# Altium PCB PCB_TPS5430.PcbDoc
Units mil, origin at the board's own origin, x right, y up, seen from the top; angles counter-clockwise.
Board outline 1417.32 x 708.66 mil, 2 copper layers (Top Layer, Bottom Layer); 34 components, 13 nets, 83 pads, 165 vias.
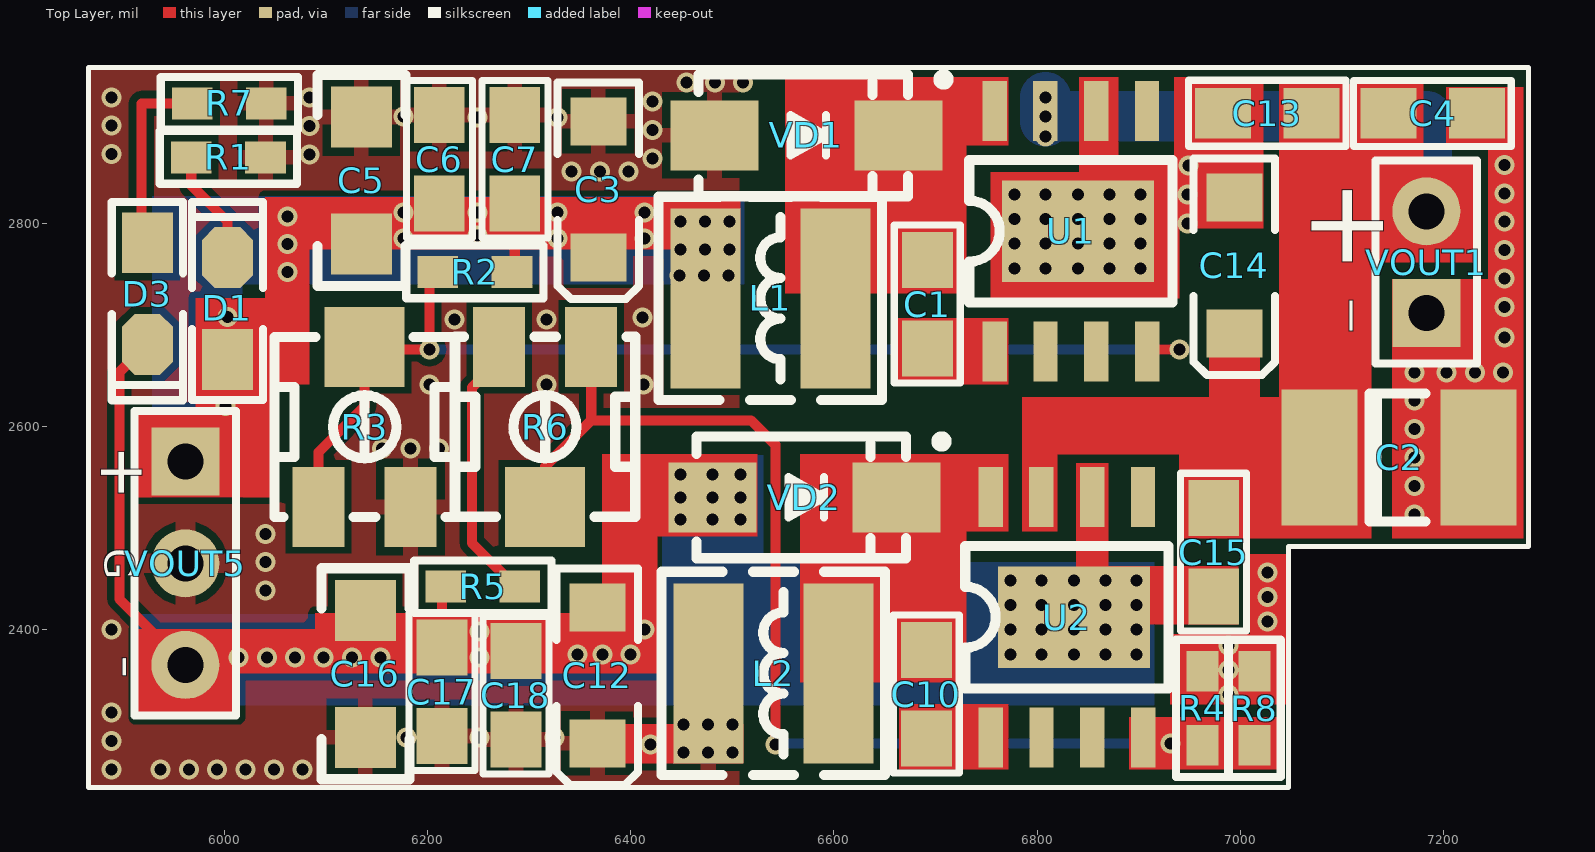
[diagram p0: Top Layer view]
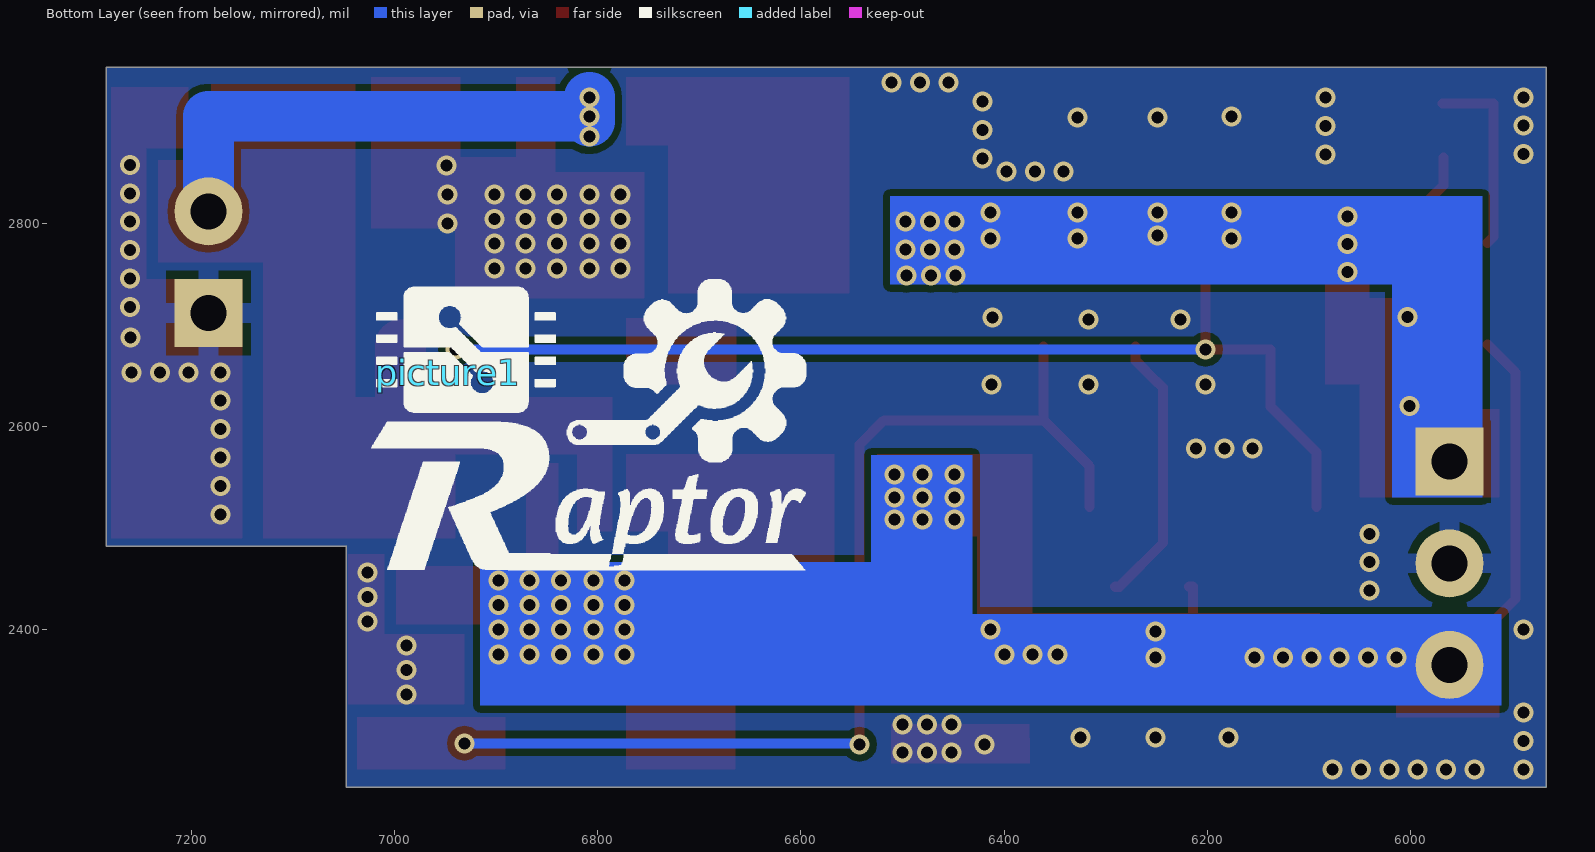
[diagram p1: Bottom Layer view, seen from below]

## Layer stack, top to bottom
Top Solder: solder mask 0.4, Solder Resist, Dk 3.5
Top Layer: signal copper 1.4
Dielectric 1: dielectric 12.6, FR-4, Dk 4.8
Bottom Layer: signal copper 1.4
Bottom Solder: solder mask 0.4, Solder Resist, Dk 3.5

## Board outline
5866.14,2245.08 7047.24,2245.08 7047.24,2246.06 7047.24,2482.28 7283.46,2482.28 7283.46,2953.74 5866.14,2953.74

## Design rules (kind name [scope] priority, off if disabled: settings)
Clearance [All] p1: gap=7 ignorepadtopadclearanceinfootprint=FALSE
PolygonConnect [All] p1: thpad.connectstyle=Relief thpad.reliefconductorwidth=20 thpad.reliefentries=4 thpad.polygonreliefangle="90 Angle" thpad.airgapwidth=8 smdpad.connectstyle=Relief smdpad.reliefconductorwidth=15 smdpad.reliefentries=4 smdpad.polygonreliefangle="90 Angle" smdpad.airgapwidth=8 via.connectstyle=Direct via.reliefconductorwidth=10 via.reliefentries=4 via.polygonreliefangle="90 Angle" via.airgapwidth=10
RoomDefinition Sheet_TPS5430 [InComponentClass('Sheet_TPS5430')] p1: confinementstyle=ConfineIn formatcopy=TRUE lockcomponents=FALSE outline 0,0 2000,0 2000,1000 0,1000
RoutingVias [All] p1: holewidth=28 width=50 viastyle="Through Hole" minholewidth=28 minwidth=50 maxholewidth=28 maxwidth=50
SolderMaskExpansion [All] p1: expansion=4 istentingtop=FALSE
Width [All] p1: maxlimit=50 minlimit=10 preferedwidth=10
30 further rules are at their usual default settings.

## Components (designator, comment, footprint, x,y, rotation, side; value= is the part's Value field where it differs from the comment)
C1 "103" 0805c 6691.65,2677.21 r90 top
C2 "1uf" 1812 7154.53,2569.88 r0 top
C3 "钽电容(大)" "CD A(3216)" 6368.11,2833.66 r90 top
C4 "104" 0805c 7232.63,2908.19 r180 top
C5 "100uF" 1206C 6129.93,2842.92 r270 top
C6 "104" 0805c 6211.87,2906.81 r270 top
C7 "10uF" 0805c 6286.12,2906.76 r270 top
C10 "103" 0805c 6690.67,2293.35 r90 top
C12 "钽电容(大)" "CD A(3216)" 6367.13,2355.32 r90 top
C13 "104" 0805c 6982.92,2908.74 r0 top
C14 "钽电容(大)" "CD A(3216)" 6994.09,2758.86 r90 top
C15 "104" 0805c 6973.43,2433.07 r90 top
C16 "100uF" 1206C 6143.69,2356.31 r90 top
C17 "104" 0805c 6213.88,2295.56 r90 top
C18 "10uF" 0805c 6286.68,2292.29 r90 top
D1 "0805led" "LED 0805B" 6003.07,2716.38 r90 top
D3 "0805led" "LED 0805B" 5924.21,2731.1 r270 top
L1 "15/22uH" CD42 6537.4,2726.38 r180 top
L2 "15/22uH" CD42 6540.35,2357.28 r180 top
picture1 "图标" rapter 6946.85,2653.54 r180 bottom
R1 "1k" "R 0603" 6003.94,2865.16 r0 top
R2 "10k" "R 0603" 6246.56,2752.44 r0 top
R3 "3.24k" RPart 6135.83,2600.39 r90 top
R4 "0R" "R 0603" 6962.6,2322.83 r90 top
R5 "10k" "R 0603" 6254.4,2442.52 r0 top
R6 "5k" RPart 6317.91,2599.41 r270 top
R7 "1k" "R 0603" 6004.84,2918.31 r180 top
R8 "0R" "R 0603" 7013.78,2322.83 r90 top
U1 "TPS5430" "SOIC-8(ADD 9PIN)" 6841.54,2792.32 r90 top locked
U2 "TPS5430" "SOIC-8(ADD 9PIN)" 6837.6,2412.4 r90 top locked
VD1 "US1G" SMA 6572.83,2886.81 r0 top
VD2 "US1G" SMA 6570.87,2530.51 r0 top
VOUT1 "Header 2" HDR-1X2 7183.07,2712.01 r90 top
VOUT5 "Header 3" HDR-1X3 5961.61,2565.55 r270 top

## Footprints (in the part's own frame and the unit in brackets; to place one, negate y for a bottom-side part, rotate by r counter-clockwise, add the part's x,y. Pads: shape width x height; smd on the part's side, far side on the other; paste and mask are expansions set on the pad)
0805c [mm]
  rect 1.4x1.27 smd: 1(-0.001,-0.007) 2(2.209,-0.007)
  silkscreen extent -0.86,-0.83 3.08,0.82, body extent -0.41,-0.67 2.59,0.73, height 0.93
1206C [mil]
  rect 60x60 smd: 1(-62.02,4.91) 2(62.98,4.91)
  silkscreen extent -103,-38 104,48, body extent -64,-27 62,36, height 24
1812 [mm] "Chip Capacitor; Body 4.5 x 3.2 mm (LxW typ)"
  rect 1.9x3.4 smd: 1(-1.95,0) 2(2.032,0)
  silkscreen extent -0.7,-1.6 0.7,1.6, body extent -2,-1.6 2.5,1.6, height 1.6
CD42 [mm] "4.5*4*2mm（长宽高）"
  rect 1.75x4.5 smd: 1(-1.625,0) 2(1.625,0)
  silkscreen extent -2.79,-2.54 2.79,2.54, body extent -2.21,-2 2.21,2, height 2.1
"CD A(3216)" [mm] "长3.2mm，宽1.6mm，厚1.6mm"
  rect 1.2x1.4 smd: 1(-1.7,0) 2(1.7,0)
  silkscreen extent -2.74,-1.02 2.67,1.02, body extent -1.6,-0.8 1.6,0.8, height 1.6
HDR-1X2 [mm] "排针，2脚"
  rect 1.7x1.7 hole 0.9: 1(0,0)
  round 1.7 hole 0.9: 2(2.54,0)
  silkscreen extent -1.27,-1.27 3.81,1.27, body extent -1.27,-1.27 3.81,1.27, height 8.5
HDR-1X3 [mm] "排针，3脚"
  rect 1.7x1.7 hole 0.9: 1(0,0)
  round 1.7 hole 0.9: 2(2.54,0) 3(5.08,0)
  silkscreen extent -1.27,-1.27 6.35,1.27, body extent -1.27,-1.27 6.35,1.27, height 8.5
"LED 0805B" [mil] "蓝色0805LED"
  rect 60x50 smd: 1(-50,0)
  oct 60x50 smd: 2(50,0)
  silkscreen extent -90,-35 105,35, body extent -39,-25 39,25, height 32
"R 0603" [mil] "1/10W贴片电阻"
  rect 40x31.5 smd: 1(-36.5,0) 2(36.5,0)
  silkscreen extent -68,-26 68,26, body extent -31,-16 32,16, height 16
rapter [mil]
  silkscreen extent -76,-195 352,91
RPart [mm]
  rect 2x1.3 smd: 1(-2.014,-1.203) 3(-2.014,1.097)
  rect 2x2 smd: 2(1.986,-0.053)
  silkscreen extent -2.26,-2.3 2.24,2.2
SMA [mm] "4.5x2.6*2.2mm（长宽高，不包括引脚）"
  rect 2.2x1.75 smd: 1(-2.3,0) 2(2.3,0)
  silkscreen extent -2.7,-1.52 3.56,1.52, body extent -2.53,-1.3 2.58,1.3, height 2.15
"SOIC-8(ADD 9PIN)" [mil]
  rect 59.06x24 smd: 1(-118.3,83.4) 2(-118.3,33.34) 3(-118.3,-16.66) 4(-118.3,-66.66) 5(118.2,-66.6) 6(118.2,-16.6) 7(118.2,33.4) 8(118.2,83.4)
  rect 100x150 smd: 9(-0.06,1.34)
  silkscreen extent -70,-92 70,108, body extent -119,-87 117,105, height 67

## Part data
C1 C10: library part 0805C
C2: library part Cap, "贴片电容", LatestRevisionDate=17-Jul-2002, LatestRevisionNote="Re-released for DXP Platform.", PackageDescription="Radial Cap, Thru-Hole; 2 Leads; 0.3 in Pin Spacing", PackageReference=RAD-0.3, Published=8-Jun-2000, Publisher="Altium Limited"
C4 C6 C7 C13 C15 C17 C18: library part 0805c
C5 C16: library part 1206c
L1 L2: library part 电感
picture1: library part SP
R1 R2 R4 R5 R7 R8: library part 0805r
R3 R6: library part RES_TAP
VD1 VD2: library part SS14, "肖特基二极管", BOM名称=肖特基二极管, 学习资源=www.ooocke.com, 属性=40V/1A, 版权归属=源创客
VOUT1: "Header, 2-Pin", LatestRevisionDate=17-Jul-2002, LatestRevisionNote="Re-released for DXP Platform.", Publisher="Altium Limited"
VOUT5: "Header, 3-Pin", LatestRevisionDate=17-Jul-2002, LatestRevisionNote="Re-released for DXP Platform.", Publisher="Altium Limited"

## Via types
v1: diameter 19.68, hole 11.81, Top Layer to Bottom Layer, tented both sides, 165 vias

## Nets (pads, with @x,y where several pads share a name; then routed paths per layer and width w, separated by ;. In a path a pad name is that pad's centre, name@x,y a point inside that pad or via, vN(x,y) a via of type N, cw(c..) or ccw(c..) an arc to the next point about the centre after c; other vN are vias at no path point)
GND: C2.2 C3.2 C4.1 C5.1 C6.1 C7.1 C12.1 C13.1 C14.2 C16.1 C17.1 C18.1 L2.2 R1.2 R3.1 R4.2 R7.1 R8.2 U1.6 U1.9 VD1.1 VOUT1.1 VOUT5.2
  other v1: 5888.78,2262.8 5937.01,2262.8 5964.96,2262.8 5992.91,2262.8 6020.87,2262.8 6048.82,2262.8 6076.77,2262.8 6451.77,2279.22 6475.89,2279.22 6500,2279.22 6419.29,2287.4 5888.78,2290.75 6179.13,2294.29 6250.98,2294.29 6324.8,2294.29 6451.77,2307.09 6475.89,2307.09 6500,2307.09 5888.78,2318.7 6988.19,2336.61 6988.19,2360.73 6988.19,2384.84 5888.78,2400.59 7026.57,2408.46 7026.57,2432.58 6040.44,2438.68 7026.57,2456.69 6040.44,2466.63 6040.44,2494.59 7171.26,2513.78 7171.26,2541.73 7171.26,2569.69 6155.28,2578.63 6183.23,2578.63 6211.18,2578.63 7171.26,2597.64 7171.26,2625.59 6201.77,2641.73 6316.93,2641.73 6412.4,2641.73 7171.26,2653.54 7202.76,2653.54 7230.71,2653.54 7258.66,2653.54 7259.84,2687.99 6226.38,2705.71 6316.93,2705.71 6411.42,2707.68 7260.21,2717.91 7260.21,2745.86 6777.56,2755.91 6808.14,2755.91 6840.2,2755.91 6871.06,2755.91 6901.57,2755.91 7260.21,2773.82 6777.56,2780.51 6808.14,2780.51 6840.2,2780.51 6871.06,2780.51 6901.57,2780.51 6947.83,2800.2 7260.21,2801.77 6777.56,2804.63 6808.14,2804.63 6840.2,2804.63 6871.06,2804.63 6901.57,2804.63 6777.56,2828.74 6808.14,2828.74 6840.2,2828.74 6871.06,2828.74 6901.57,2828.74 6947.83,2828.74 7260.21,2829.72 6341.73,2851.38 6369.69,2851.38 6397.64,2851.38 6948.82,2857.28 7260.21,2857.67 6421.26,2864.17 5888.78,2868.31 6083.66,2868.11 6421.26,2892.13 5888.78,2896.26 6083.66,2896.06 6249.02,2904.53 6327.76,2904.53 6176.18,2905.51 6421.26,2920.08 5888.78,2924.21 6083.66,2924.02 6454.72,2938.98 6482.68,2938.98 6510.63,2938.98
NetC1_1: C1.1 U1.1
NetC1_2: C1.2 L1.1 U1.8 VD1.2
NetC10_1: C10.1 U2.1
NetC10_2: C10.2 L2.1 U2.8 VD2.2
NetD1_2: D1.2 R1.1 | length 113.5
  Top Layer w10: R1.1 5967.44,2837.68 6003.07,2802.05 D1.2
NetD3_1: D3.1 R7.2 | length 189.7
  Top Layer w10: D3.1 5918.31,2787.01 5918.31,2918.31 R7.2
NetR2_1: R2.1 R3.2 R3.3 U1.4 | length 1094.3
  Top Layer w10: R3.3 6092.65,2574.93 6137.93,2620.21 6137.93,2676.18 v1(6201.77,2676.18) 6201.77,2752.44 R2.1 ; U1.4 6908.2,2676.18 v1(6939.96,2676.18)
  Bottom Layer w10: v1(6201.77,2676.18) v1(6939.96,2676.18)
NetR4_1: R4.1 R6.2 R6.3 R8.1 U2.4 | length 1051.5
  Top Layer w10: R6.2 6315.81,2561.02 6361.09,2606.3 ; R6.3 6361.09,2606.3 ; v1(6542.32,2287.4) 6542.32,2582.33 6518.35,2606.3 6361.09,2606.3
  Bottom Layer w10: v1(6542.32,2287.4) 6543.31,2288.39 v1(6931.1,2288.39)
NetR5_2: R5.2 R6.1 | length 269.7
  Top Layer w10: R6.1 6270.53,2664.91 6249.94,2644.32 6249.44,2644.32 6243.59,2638.46 6243.59,2485.58 6286.64,2442.52 R5.2
VC5N: C12.2 C15.1 C16.2 C17.2 C18.2 D3.2 R5.1 U2.6 U2.9 VD2.1 VOUT5.3 | length 417.6
  Top Layer w10: D3.2 5896.65,2653.54 5896.65,2430.51 VOUT5.3 ; C17.2 6214.16,2442.52 R5.1
  other v1: 6013.78,2373.03 6041.73,2373.03 6069.68,2373.03 6097.64,2373.03 6125.59,2373.03 6153.54,2373.03 6250.98,2373.03 6347.44,2375.98 6372.05,2375.98 6399.61,2375.98 6773.62,2375.98 6804.2,2375.98 6836.26,2375.98 6867.13,2375.98 6897.64,2375.98 6250.98,2398.62 6413.39,2400.59 6773.62,2400.59 6804.2,2400.59 6836.26,2400.59 6867.13,2400.59 6897.64,2400.59 6773.62,2424.7 6804.2,2424.7 6836.26,2424.7 6867.13,2424.7 6897.64,2424.7 6773.62,2448.82 6804.2,2448.82 6836.26,2448.82 6867.13,2448.82 6897.64,2448.82 6448.82,2508.86 6480.31,2508.86 6507.87,2508.86 6448.82,2530.51 6480.31,2530.51 6507.87,2530.51 6448.82,2553.15 6480.31,2553.15 6507.87,2553.15
VC5P: C3.1 C5.2 C6.2 C7.2 D1.1 L1.2 R2.2 VOUT5.1 | length 68.5
  Top Layer w10: R2.2 6285.85,2755.23 C7.2
  other v1: 6000.92,2620.21 6003.07,2708.01 6447.83,2749.02 6471.95,2749.02 6496.06,2749.02 6062.01,2752.44 6448.82,2774.29 6472.93,2774.29 6497.05,2774.29 6062.01,2779.94 6176.18,2785.43 6327.76,2785.43 6413.39,2785.43 6249.02,2788.39 6448.82,2802.17 6472.93,2802.17 6497.05,2802.17 6062.01,2807.09 6176.18,2811.02 6249.02,2811.02 6327.76,2811.02 6413.39,2811.02
VC12: C2.1 C4.2 C13.2 C14.1 C15.2 U1.7 U2.7 VOUT1.2 | length 666.3
  Top Layer w50: C15.2 6994.09,2520.03 C14.1@6994.09,2680.71
  Bottom Layer w50: v1@6808.07,2900.59 v1(6808.07,2905.51) v1(6808.07,2924.21) ; v1@6814.96,2905.51 7183.07,2905.51 VOUT1.2
  other v1: 6808.07,2885.83
pads on no net: U1.2 U1.3 U1.5 U2.2 U2.3 U2.5

## Polygon pours and split planes (outlines as drawn)
GND on Top Layer "GND_L01_P000" (solid, remove dead copper, pour order 0): 5865.97,2953.88 5865.97,2246.2 6506.72,2246.2 6506.72,2954.87
GND on Bottom Layer "GND_L02_P001" (solid, remove dead copper, pour order 1): 5866.14,2953.74 7283.46,2953.74 7283.46,2482.28 7047.24,2482.28 7047.24,2245.08 5866.14,2245.08

## Other copper
Top Layer:
  region net GND: 7202.76,2934.06 7278.54,2934.06 7278.54,2736.11 7244.09,2736.11 7244.09,2874.02 7202.76,2874.02
  region net GND: 7278.54,2745.08 7278.54,2490.16 7149.61,2490.16 7149.61,2745.08
  region net GND: 6375,2307.09 6510.83,2307.09 6510.83,2268.7 6374.63,2268.7 6374.63,2280.89
  region net GND: 6931.1,2395.67 7009.84,2395.67 7009.84,2474.41 7045.28,2474.41 7045.28,2326.77 6931.1,2326.77
  region net NetC10_1: 6664.37,2326.77 6771.65,2326.77 6771.65,2262.8 6664.37,2262.8
  region net NetR4_1: 6890.75,2313.98 7036.42,2313.98 7036.42,2262.8 6890.75,2262.8
  region net VC5N: 5912.4,2400.59 5912.4,2313.98 6013.78,2313.98 6013.78,2400.59
  region net VC5P: 5912.4,2617.13 5912.4,2530.6 6049.98,2530.6 6049.98,2617.13
  region net VC5P: 6507.87,2774.91 6507.87,2825.79 6040.44,2825.79 6040.44,2726.38 5971.69,2726.38 5971.69,2530.6 6049.98,2530.6 6049.98,2641.73 6083.66,2641.73 6083.66,2774.29
  region net NetC1_1: 6663.39,2706.69 6771.65,2706.69 6771.65,2641.73 6663.39,2641.73
  region net NetC1_2: 6552.17,2943.9 6771.65,2943.9 6771.65,2876.97 6730.31,2876.97 6730.31,2731.3 6552.17,2731.3
  region net VC5N: 6998.03,2462.6 6998.03,2405.51 6838.58,2405.51 6838.58,2462.6
  region net GND: 6841.54,2943.9 6841.54,2850.39 6754.2,2850.39 6754.2,2726.38 6939.96,2726.38 6939.96,2795.28 7022.64,2795.28 7022.64,2943.9 6935.04,2943.9 6935.04,2865.16 6879.92,2865.16 6879.92,2943.9
  region net VC12: 6785.43,2497.05 6785.43,2628.94 7038.39,2628.94 7038.39,2850.39 7038.39,2937.01 7180.12,2937.01 7180.12,2862.2 7232.68,2862.2 7232.68,2761.81 7128.94,2761.81 7128.94,2651.57 7128.94,2490.16 6939.96,2490.16 6939.96,2572.83 6819.88,2572.83 6819.88,2497.05
  region net VC5N: 6838.58,2563.98 6838.58,2408.46 6870.08,2408.46 6870.08,2563.98
  region net VC5N: 6524.61,2572.83 6524.61,2492.13 6426.18,2492.13 6426.18,2357.28 5912.4,2357.28 5912.4,2400.59 6089.43,2400.59 6089.43,2416.34 6372.05,2416.34 6372.05,2572.83
  region net NetC10_2: 6566.93,2572.83 6771.65,2572.83 6771.65,2497.05 6730.31,2497.05 6730.31,2348.43 6566.93,2348.43
Bottom Layer:
  region net VC5P: 5929.13,2530.51 6017.72,2530.51 6017.72,2740.16 6435.04,2740.16 6511.81,2740.16 6511.81,2826.77 5929.13,2826.77
  region net VC5N: 6915.35,2466.54 6530.51,2466.54 6530.51,2571.85 6431.1,2571.85 6431.1,2415.35 5910.43,2415.35 5910.43,2325.79 6915.35,2325.79

## Silkscreen, mask and mechanical layers (free items; w line width, h text height)
Top Overlay:
  lines w5: 5866.14,2245.08 7047.24,2245.08 7047.24,2482.28 7283.46,2482.28 7283.46,2953.74 5866.14,2953.74 5866.14,2245.08
  text "+" at 7043.14,2844.36 h140 r270
  text "-" at 7054.76,2729.51 h140 r270
  text "+" at 5863.79,2581.82 h80 r270
  text "G" at 5872.63,2480.36 h50 r270
  text "-" at 5870.43,2374.89 h80 r270
Mechanical 1:
  lines w5: 7047.24,2245.08 5866.14,2245.08 5866.14,2953.74 7283.46,2953.74 7283.46,2482.28 7047.24,2482.28 7047.24,2246.06

## Dimensions
5866.14,2953.74 to 5866.14,2245.08 on Top Overlay
5866.14,2953.74 to 7283.46,2953.74 on Top Overlay